# Altium PCB project2.PcbDoc
Units mil, origin at the board's own origin, x right, y up, seen from the top; angles counter-clockwise.
Board outline 4345 x 3770 mil, 2 copper layers (Top Layer, Bottom Layer); 46 components, 57 nets, 187 pads, 12 vias.
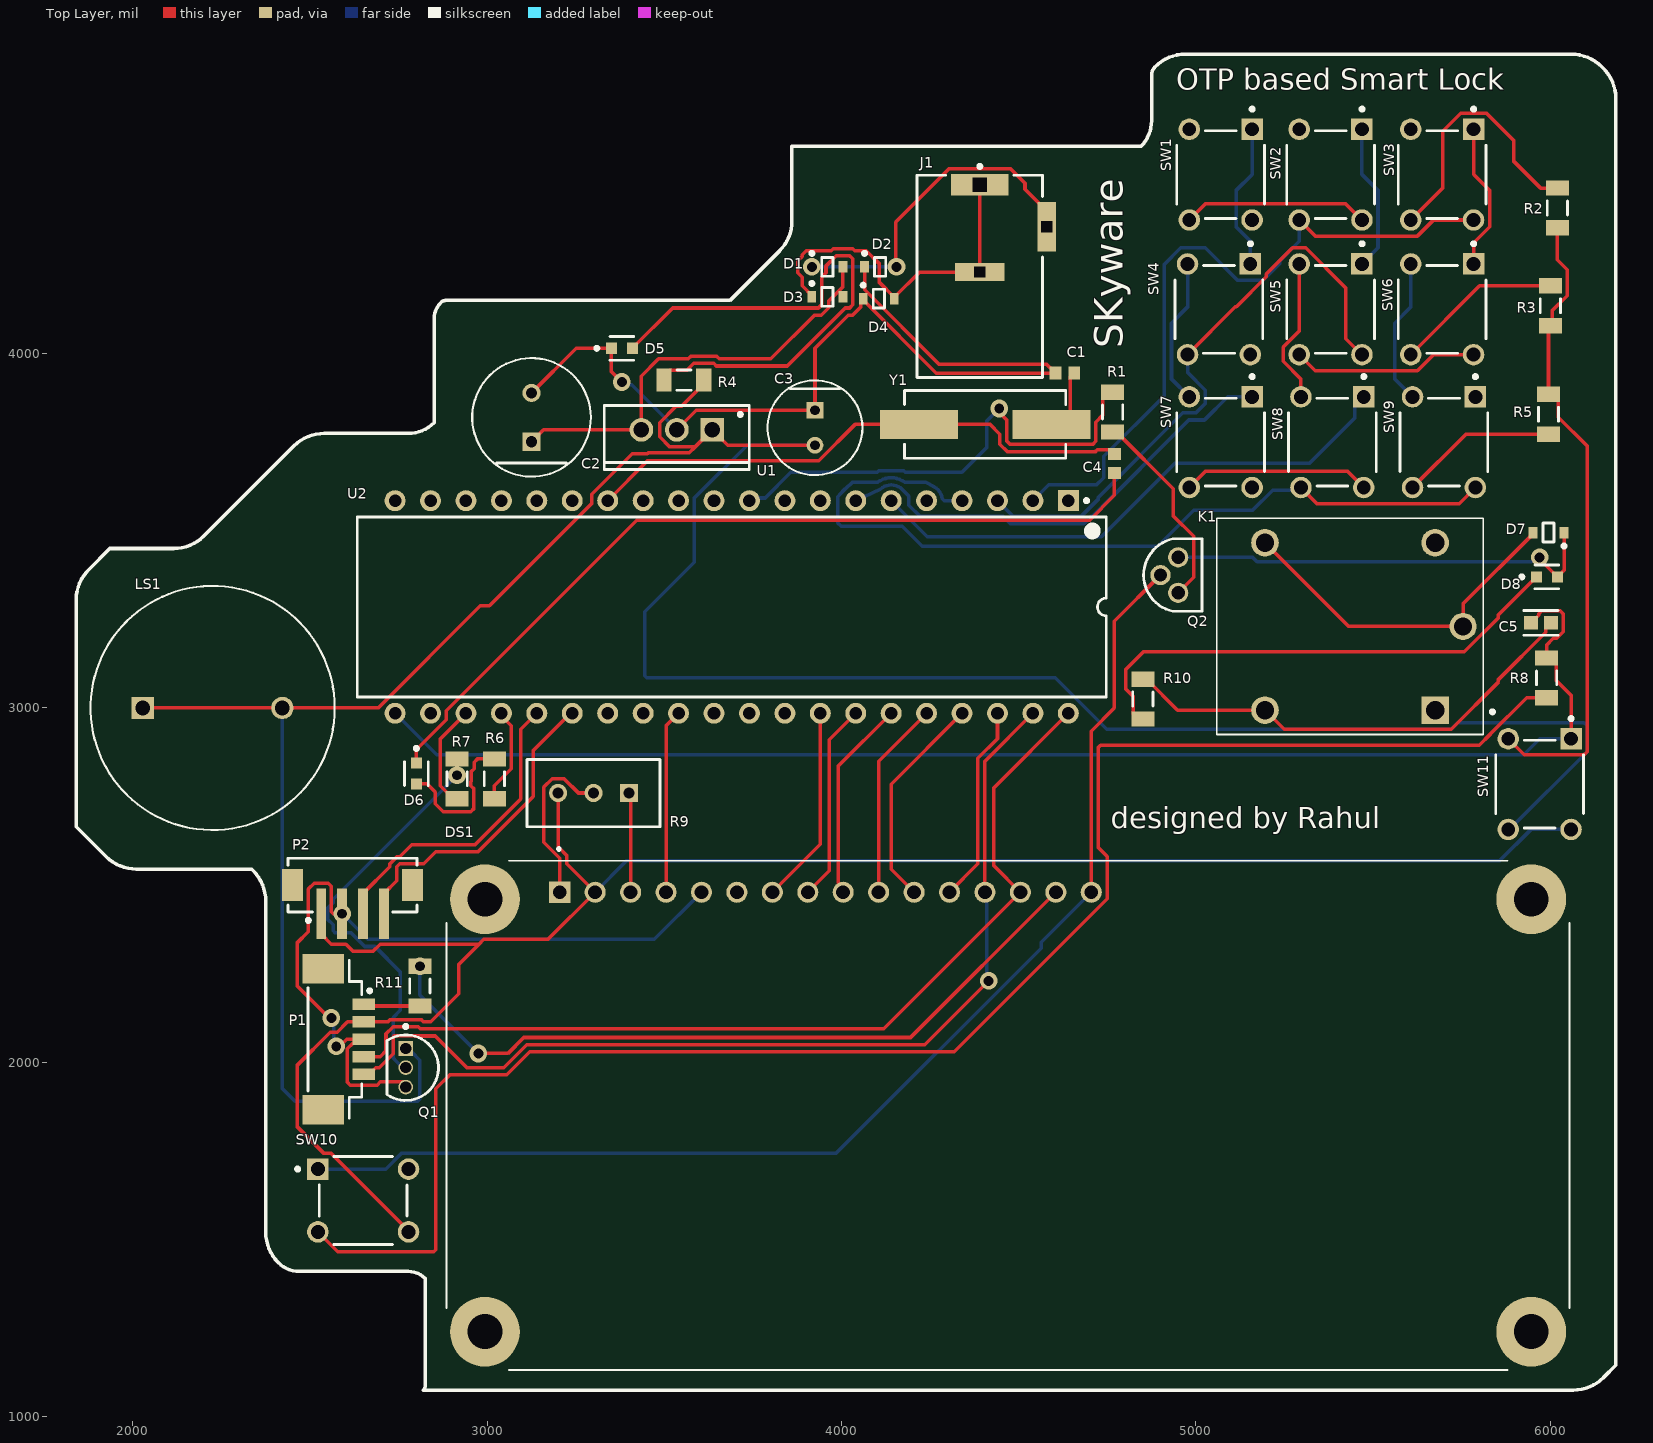
[diagram p0: Top Layer view]
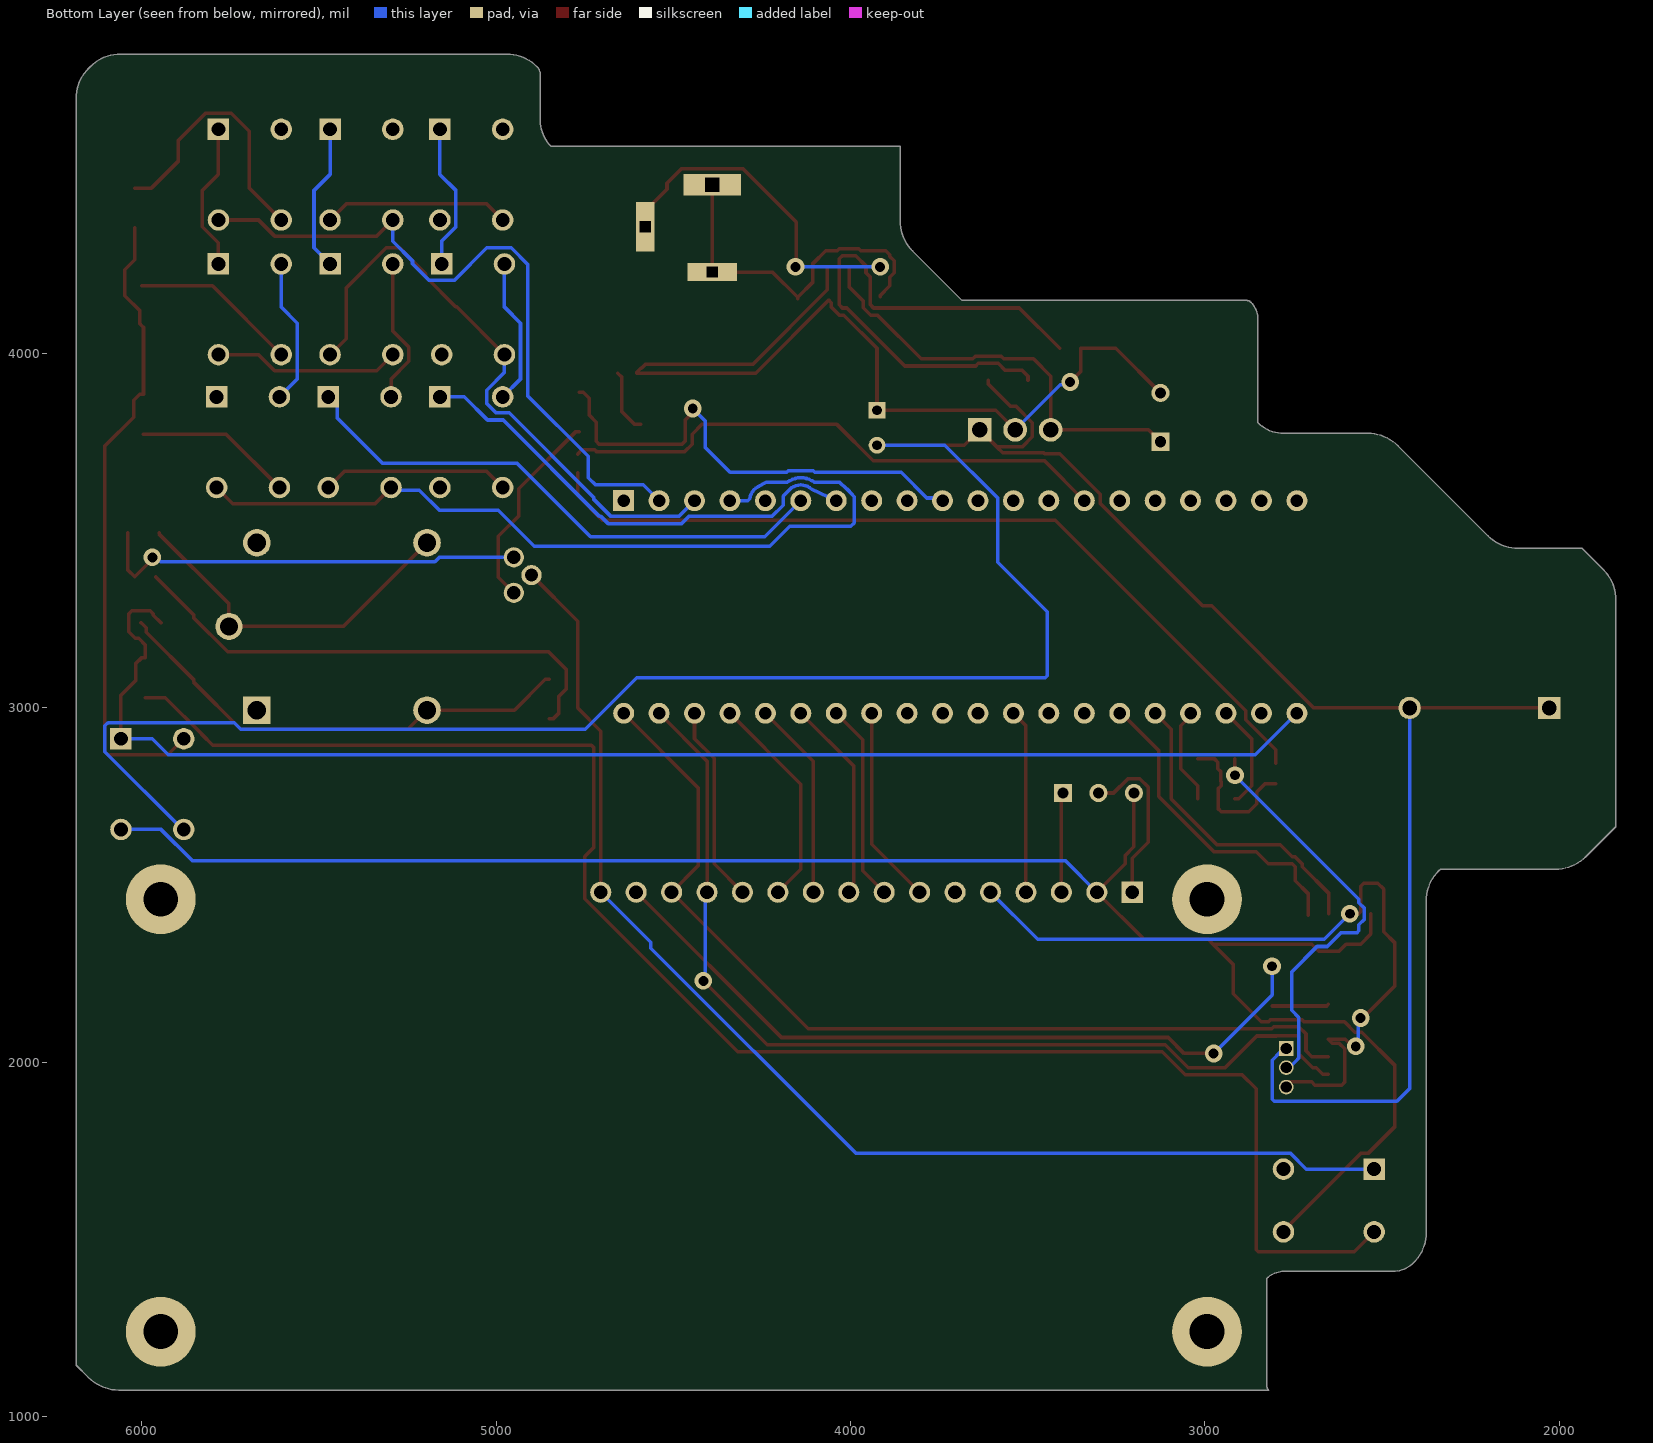
[diagram p1: Bottom Layer view, seen from below]
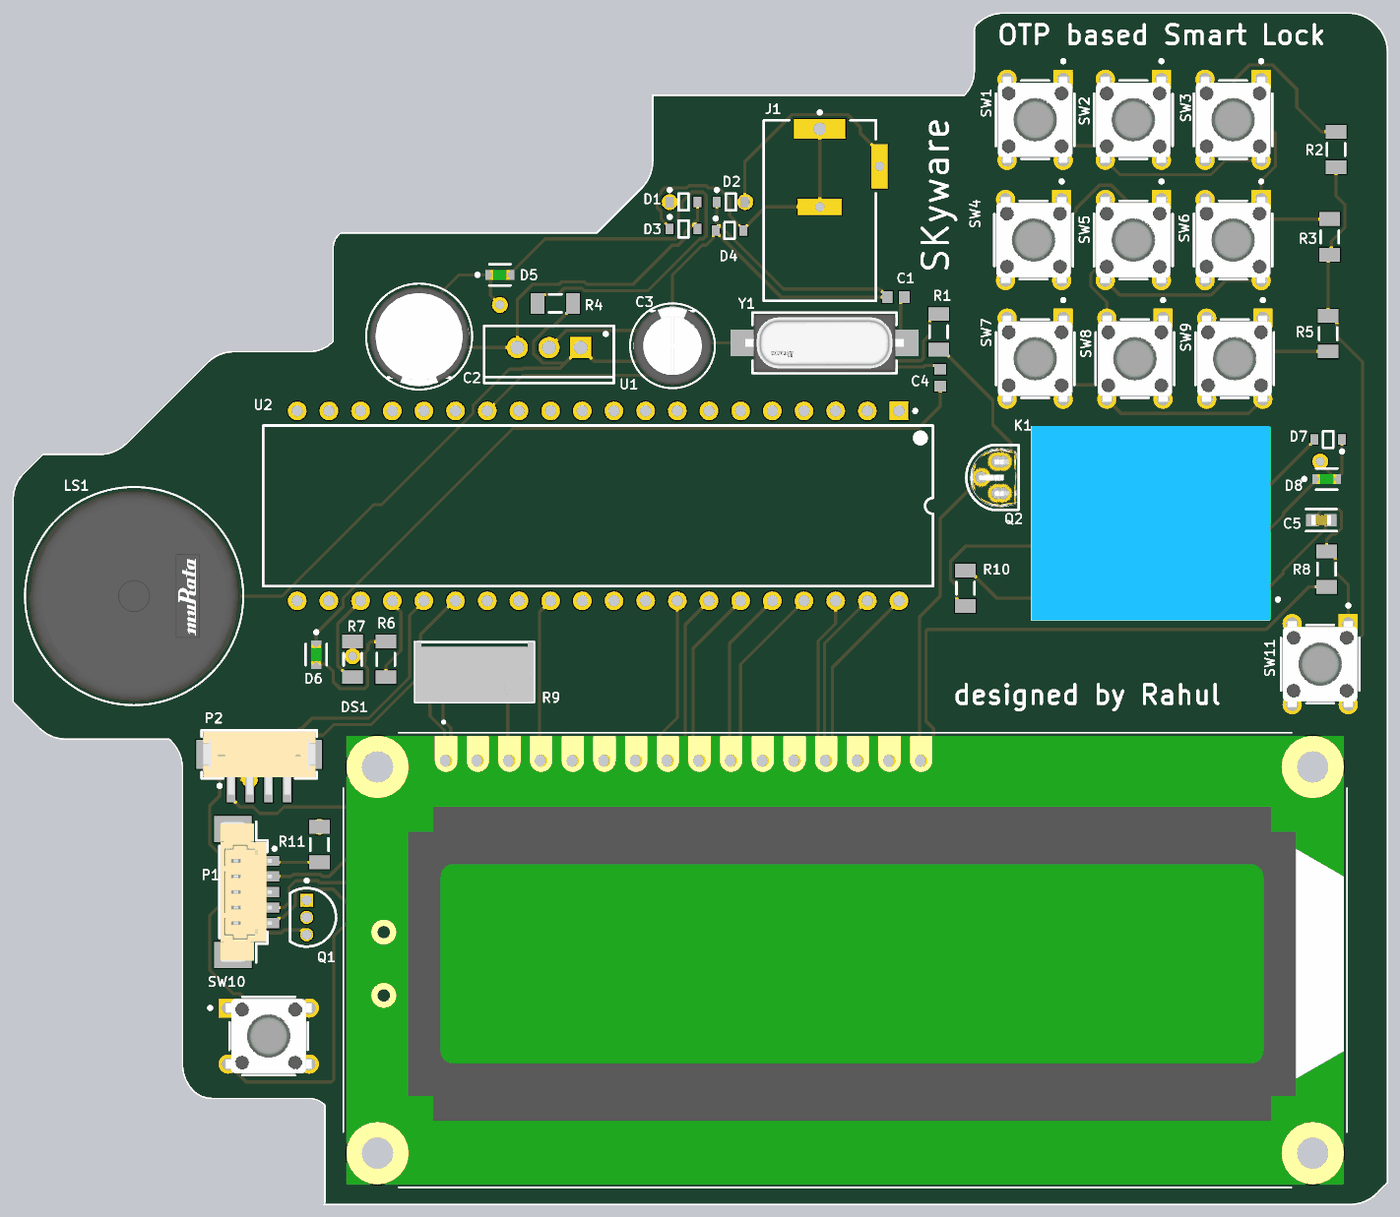
[diagram p2: 3D render of the assembled board from above, using the file's embedded part models]

## Layer stack, top to bottom
Top Solder: solder mask 0.4, Solder Resist, Dk 3.5
Top Layer: signal copper 1.4
Dielectric 1: dielectric 12.6, FR-4, Dk 4.8
Bottom Layer: signal copper 1.4
Bottom Solder: solder mask 0.4, Solder Resist, Dk 3.5

## Board outline
2375,2455 ccw(c2254.29,2455) 2339.64,2540.36 2335,2545 2010,2545 cw(c2010,2665.71) 1924.64,2580.36 1840,2665 1840,3305 cw(c1960.71,3305) 1875.36,3390.36 1935,3450 2115,3450 ccw(c2115,3570.71) 2200.36,3485.36 2454.64,3739.64 cw(c2540,3654.29) 2540,3775 2777.57,3775 ccw(c2777.57,3877.43) 2850,3805 2850,4096.72 cw(c2918.28,4096.72) 2870,4145 cw(c2882.07,4132.93) 2882.07,4150 3685,4150 3824.64,4289.64 ccw(c3739.29,4375) 3860,4375 3860,4585 4845,4585 ccw(c4772.57,4657.43) 4875,4657.43 4875,4786.36 cw(c4907.93,4786.36) 4884.64,4809.64 cw(c4970,4724.29) 4970,4845 6060,4845 cw(c6060,4724.29) 6145.36,4809.64 6149.64,4805.36 cw(c6064.29,4720) 6185,4720 6185,1145 6150.36,1110.36 cw(c6065,1195.71) 6065,1075 2820,1075 ccw(c2807.93,1087.07) 2825,1087.07 2825,1390 ccw(c2776.72,1341.72) 2776.72,1410 2469.85,1410 cw(c2469.85,1494.14) 2410.36,1434.64 cw(c2495.71,1520) 2375,1520

## Design rules (kind name [scope] priority, off if disabled: settings)
Clearance [All] p1: gap=10 ignorepadtopadclearanceinfootprint=FALSE
PolygonConnect [All] p1: connectstyle=Relief reliefconductorwidth=10 reliefentries=4 polygonreliefangle="90 Angle" airgapwidth=10
RoutingVias [All] p1: holewidth=28 width=50 viastyle="Through Hole" minholewidth=28 minwidth=50 maxholewidth=28 maxwidth=50
SolderMaskExpansion [All] p1: expansion=4 istentingtop=FALSE
Width [All] p1: maxlimit=10 minlimit=10 preferedwidth=10
30 further rules are at their usual default settings.

## Components (designator, comment, footprint, x,y, rotation, side; value= is the part's Value field where it differs from the comment)
C1 "GRM188R71H102KA01D" CAPC1608X90X35NL10T15 4630,3945 r0 top
C2 "EEUFM1V221L" FP-RAD-TH-D_8_0_5-L_15_1-MFG 3125,3820 r90 top
C3 "EEUHD1E101" FP-RAD-TH-D_6_3_0_5-L_11-MFG 3925,3790.79 r270 top
C4 "GRM188R71H102KA01D" CAPC1608X90X35NL10T15 4770,3690 r90 top
C5 "06035A221JAT2A" FP-0603-L_1_6_0_15-W_0_81-IPC_B 5973.58,3240 r0 top
D1 "BAT54HT1G" ONSC-SOD-323-2-477-02_V 3960,4245 r0 top
D2 "BAT54HT1G" ONSC-SOD-323-2-477-02_V 4108.9,4245 r0 top
D3 "BAT54HT1G" ONSC-SOD-323-2-477-02_V 3960,4160 r0 top
D4 "BAT54HT1G" ONSC-SOD-323-2-477-02_V 4105,4155 r0 top
D5 "LTST-C190GKT" FP-LTST-C190GKT-MFG 3380,4015 r0 top
D6 "LTST-C190GKT" FP-LTST-C190GKT-MFG 2800,2815 r270 top
D7 "BAT54HT1G" ONSC-SOD-323-2-477-02_V 5995,3495 r180 top
D8 "LTST-C190GKT" FP-LTST-C190GKT-MFG 5990.47,3370 r0 top
DS1 "RC1602B-BIW-CSV" LCD_RC1602B-BIW-CSV 4470,1850 r0 top
J1 "RAPC712X" SWITCH-RAPC712X-3_V 4390,4353.03 r0 top
K1 "SRD-05VDC-SL-C" RELAY_SRD-05VDC-SL-C 5435,3230 r180 top
LS1 "PKM17EPPH4001-B0" FP-PKM17EPPH4001-B0-MFG 2225,3000 r0 top
P1 "653105124022" 653105124022 2570,2065 r270 top
P2 "679304124022" 679304124022 2620,2500 r180 top
Q1 "BC547B" ONSC-TO-92-3-29-11 2770,1985 r270 top
Q2 "BC548" FP-135AN-MFG 4935.04,3375 r0 top
R1 "ERJ-8GEY0R00V" RESC3216X70X50NL05T20 4765,3835 r90 top
R2 "ERJ-8GEY0R00V" RESC3216X70X50NL05T20 6020,4411.1 r90 top
R3 "ERJ-8GEY0R00V" RESC3216X70X50NL05T20 6000,4135 r90 top
R4 "ERJ-8GEY0R00V" RESC3216X70X50NL05T20 3555,3925 r0 top
R5 "ERJ-8GEY0R00V" RESC3216X70X50NL05T20 5995,3828.9 r270 top
R6 "ERJ-8GEY0R00V" RESC3216X70X50NL05T20 3020,2800 r90 top
R7 "ERJ-8GEY0R00V" RESC3216X70X50NL05T20 2915,2800 r90 top
R8 "ERJ-8GEY0R00V" RESC3216X70X50NL05T20 5990,3085 r90 top
R9 "3296W-1-102LF" BOUR-3296W-1-3 3300,2760 r180 top
R10 "ERJ-8GEY0R00V" RESC3216X70X50NL05T20 4850,3025 r270 top
R11 "ERJ-8GEY0R00V" RESC3216X70X50NL05T20 2810,2215 r90 top
SW1 "1-1825910-4" FP-1-1825910-4-MFG 5070,4505 r0 top
SW2 "1-1825910-4" FP-1-1825910-4-MFG 5380,4505 r0 top
SW3 "1-1825910-4" FP-1-1825910-4-MFG 5695,4505 r0 top
SW4 "1-1825910-4" FP-1-1825910-4-MFG 5065,4125 r0 top
SW5 "1-1825910-4" FP-1-1825910-4-MFG 5380,4125 r0 top
SW6 "1-1825910-4" FP-1-1825910-4-MFG 5695,4125 r0 top
SW7 "1-1825910-4" FP-1-1825910-4-MFG 5070,3750 r0 top
SW8 "1-1825910-4" FP-1-1825910-4-MFG 5385,3750 r0 top
SW9 "1-1825910-4" FP-1-1825910-4-MFG 5700,3750 r0 top
SW10 "1-1825910-4" FP-1-1825910-4-MFG 2650,1610 r90 top
SW11 "1-1825910-4" FP-1-1825910-4-MFG 5970,2785 r0 top
U1 "L7805CV" TO220 3535,3785 r180 top
U2 "PIC16F887-I/P" PDIP600-P40 3690,3285 r270 top
Y1 "ABLS-8.000MHZ-B2-T" FP-ABLS-MFG 4405,3800 r180 top

## Footprints (in the part's own frame and the unit in brackets; to place one, negate y for a bottom-side part, rotate by r counter-clockwise, add the part's x,y. Pads: shape width x height; smd on the part's side, far side on the other; paste and mask are expansions set on the pad)
653105124022 [mm] "1.25mm SMT Male Vertical Shrouded Header, 5p"
  rect 0.81x1.6 smd mask+0.076: 1(-2.5,2.07) 2(-1.25,2.07)
  rect 0.81x1.6 smd: 3(0,2.07) 4(1.25,2.07) 5(2.5,2.07)
  rect 2.1x3 smd: MP1(-5.05,-0.83) MP2(5.05,-0.83)
  silkscreen extent -5.65,-1.92 5.65,2.62, body extent -5.6,-1.85 5.6,2.36, height 4.74
679304124022 [mm] "1.50mm SMT Male Vertical Shrouded Header, 4p"
  rect 0.7x3.6 smd: 1(2.25,2.05) 2(0.75,2.05) 3(-0.75,2.05) 4(-2.25,2.05)
  rect 1.5x2.3 smd: MP1(-4.3,0) MP2(4.3,0)
  silkscreen extent -4.62,-1.92 4.63,2.65, body extent -4.5,-1.85 4.5,3.35, height 5.49
BOUR-3296W-1-3 [mm] "THD, 3-Leads, Body 9.53x4.83mm, Pitch 2.54mm"
  rect 1.3x1.3 hole 0.8: 1(-2.54,0)
  round 1.3 hole 0.8: 2(0,0) 3(2.54,0)
  silkscreen extent -4.76,-2.41 4.76,2.42, body extent -4.76,-2.41 4.76,2.42, height 11.55
CAPC1608X90X35NL10T15 [mm] "Chip Capacitor, 2-Leads, Body 1.60x0.80mm, IPC Medium Density"
  rect 0.85x0.95 smd: 1(-0.675,0) 2(0.675,0)
  body extent -0.85,-0.45 0.85,0.45, height 0.9
FP-1-1825910-4-MFG [mm]
  rect 1.54x1.54 hole 0.99 paste-2539.97 mask+0: 1(2.25,3.25)
  round 1.54 hole 0.99 paste-2539.97 mask+0: 2(2.25,-3.25) 3(-2.25,3.25) 4(-2.25,-3.25)
  silkscreen extent -3.15,-3.15 3.15,4.82, body extent -3.24,-4.12 3.24,4.12, height 0.25
FP-135AN-MFG [mm]
  round 1.45 hole 0.95 paste-2539.97 mask+0: 1(0.38,-1.27) 2(-0.89,0) 3(0.38,1.27)
  silkscreen extent -2.1,-2.6 2.09,2.6, body extent -2.19,-2.7 2.19,2.7, height 0.25
FP-0603-L_1_6_0_15-W_0_81-IPC_B [mil]
  rect 39.63x38.12 smd paste+0 mask+0: 1(-28.58,0) 2(28.58,0)
  silkscreen extent -48,-35 48,35, body extent -58,-29 58,29, height 10
FP-ABLS-MFG [mm]
  rect 5.6x2.1 smd paste+0 mask+0: 1(-4.75,0) 2(4.75,0)
  silkscreen extent -5.77,-2.42 5.77,2.42, body extent -7.65,-2.52 7.65,2.52, height 0.25
FP-LTST-C190GKT-MFG [mm]
  rect 0.8x0.8 smd paste+0 mask+0: 1(-0.75,0) 2(0.75,0)
  silkscreen extent -1.92,-0.85 0.85,0.85, body extent -1.25,-0.55 1.25,0.55, height 0.25
FP-PKM17EPPH4001-B0-MFG [mm]
  rect 1.6x1.6 hole 1.05 paste-2539.97 mask+0: 1(-5,0)
  round 1.6 hole 1.05 paste-2539.97 mask+0: 2(5,0)
  silkscreen extent -8.75,-8.75 8.75,8.75, body extent -8.85,-8.85 8.85,8.85, height 0.25
FP-RAD-TH-D_6_3_0_5-L_11-MFG [mm]
  rect 1.2x1.2 hole 0.7 paste-2539.97 mask+0: 1(-1.25,0)
  round 1.2 hole 0.7 paste-2539.97 mask+0: 2(1.25,0)
  silkscreen extent -3.4,-3.4 3.4,3.4, body extent -3.5,-3.5 3.5,3.5, height 0.25
FP-RAD-TH-D_8_0_5-L_15_1-MFG [mm]
  rect 1.3x1.3 hole 0.8 paste-2539.97 mask+0: 1(-1.75,0)
  round 1.3 hole 0.8 paste-2539.97 mask+0: 2(1.75,0)
  silkscreen extent -4.25,-4.25 4.25,4.25, body extent -4.35,-4.35 4.35,4.35, height 0.25
LCD_RC1602B-BIW-CSV [mm]
  rect 1.508x1.508 / inner round 1.508 / far side rect 1.508x1.508 hole 1: 1(-32.14,16)
  round 1.508 hole 1: 2(-29.6,16) 3(-27.06,16) 4(-24.52,16) 5(-21.98,16) 6(-19.44,16) 7(-16.9,16) 8(-14.36,16) 9(-11.82,16) 10(-9.28,16) 11(-6.74,16) 12(-4.2,16) 13(-1.66,16) 14(0.88,16) 15(3.42,16) 16(5.96,16)
  round 5 hole 2.5: S1(-37.5,15.5) S2(37.5,15.5) S3(37.5,-15.5) S4(-37.5,-15.5)
  silkscreen extent -40.25,-18.25 40.25,19.2, body extent -40,-18 40,18, height 8.9
ONSC-SOD-323-2-477-02_V [mm] "SOD, 2-Leads, Body 1.7x1.25mm"
  rect 0.63x0.83 smd: 1(-1.115,0) 2(1.115,0)
  silkscreen extent -1.24,-0.67 0.4,1.09, body extent -0.85,-0.63 0.85,0.63, height 1.06
ONSC-TO-92-3-29-11 [mm] "TO, 3-Leads, Body Dia 4.7mm, Pitch 1.27mm"
  rect 1.05x1.05 hole 0.8: 1(-1.372,0)
  round 1.05 hole 0.8: 2(0,0) 3(1.397,0)
  silkscreen extent -3.07,-1.34 2.35,2.35, body extent -2.35,-1.33 2.36,2.36, height 7.87
PDIP600-P40 [mm] "DIP, 40-Pin, Row Spacing 15.24 mm, Pitch 2.54 mm"
  rect 1.5x1.5 hole 0.9: 1(-7.62,24.13)
  round 1.5 hole 0.9: 2(-7.62,21.59) 3(-7.62,19.05) 4(-7.62,16.51) 5(-7.62,13.97) 6(-7.62,11.43) 7(-7.62,8.89) 8(-7.62,6.35) 9(-7.62,3.81) 10(-7.62,1.27) 11(-7.62,-1.27) 12(-7.62,-3.81) 13(-7.62,-6.35) 14(-7.62,-8.89) 15(-7.62,-11.43) 16(-7.62,-13.97) 17(-7.62,-16.51) 18(-7.62,-19.05) 19(-7.62,-21.59) 20(-7.62,-24.13) 21(7.62,-24.13) 22(7.62,-21.59) 23(7.62,-19.05) 24(7.62,-16.51) 25(7.62,-13.97) 26(7.62,-11.43) 27(7.62,-8.89) 28(7.62,-6.35) 29(7.62,-3.81) 30(7.62,-1.27) 31(7.62,1.27) 32(7.62,3.81) 33(7.62,6.35) 34(7.62,8.89) 35(7.62,11.43) 36(7.62,13.97) 37(7.62,16.51) 38(7.62,19.05) 39(7.62,21.59) 40(7.62,24.13)
  silkscreen extent -7.74,-26.85 6.45,26.85, body extent -7.3,-26.85 7.3,26.85, height 6.35
RELAY_SRD-05VDC-SL-C [mm]
  rect 1.98x1.98 / inner round 1.98 / far side rect 1.98x1.98 hole 1.32: A1(-6.1,6)
  round 1.98 hole 1.32: A2(-6.1,-6) NC(6.1,6) NO(6.1,-6)
  round 1.935 hole 1.29: COM(-8.1,0)
  silkscreen extent -10.3,-7.75 9.55,7.75, body extent -9.6,-7.8 9.6,7.8, height 15.8
RESC3216X70X50NL05T20 [mm] "Chip Resistor, 2-Leads, Body 3.20x1.60mm, IPC Medium Density"
  rect 1.1x1.65 smd: 1(-1.425,0) 2(1.425,0)
  silkscreen extent -0.5,-0.72 0.5,0.72, body extent -1.63,-0.82 1.62,0.82, height 0.7
SWITCH-RAPC712X-3_V [mm] "CONN, 3-Leads, Body 14.5x9mm"
  rect 4.1x1.55 hole 1.01 square: 1(0,3.125)
  rect 3.55x1.3 hole 0.76 square: 2(0,-3.125)
  rect 1.3x3.55 hole 0.76 square: 3(4.8,0.125)
  silkscreen extent -4.5,-10.68 4.5,4.57, body extent -4.5,-10.68 4.5,3.83, height 11
TO220 [mm] "TO, Thru-Hole, Vertical, Heatsink Mounted; 3 In-Line Leads; Pitch 2.54 mm"
  rect 1.7x1.7 hole 1.1: 1(-2.54,0)
  round 1.7 hole 1.1: 2(0,0) 3(2.54,0)
  silkscreen extent -5.2,-1.75 5.2,2.85, body extent -5.25,-1.8 5.25,2.9, height 19.7

## Part data
C1 C4: library part CMP-2006-02891-1, Manufacturer=Murata, Part Number=GRM188R71H102KA01D
C2: library part CMP-05427-000678-1, "Aluminum Electrolytic Capacitors (Radial Lead Type) 220uF ±20% 35V", Capacitance=220uF, Case/Package=Radial, Dielectric Material=Aluminium, ESR (Equivalent Series Resistance)=41mR, Max Operating Temperature=105°C, Min Operating Temperature=-40°C, Package Quantity=200, Ripple Current=1.24A, Tolerance=20%, Voltage=35V, Construction=RADIAL, Diameter=8mm, Dissipation Factor=0.12%, Height=15mm, Height - Seated (Max)=0.65inch, Impedance=41mR, Lead Diameter=0.6mm, Lead Free="Lead Free", Lead Length=17mm, Lead Pitch=3.5mm, Length=15mm, Life (Hours)=3000Hour, Mount="Through Hole", Number of Pins=2, Packaging=Bulk, Radiation Hardening=No, REACH SVHC=Yes, RoHS Compliant=Yes, Series=FM, Termination=Radial, Voltage Rating=35V, Voltage Rating (DC)=35V
C3: library part CMP-05427-000916-1, "Aluminum Electrolytic Capacitors (Radial Lead Type) AEC-Q200 Qualified 100uF ±20% 25V", Capacitance=100uF, Case/Package=Radial, Max Operating Temperature=105°C, Min Operating Temperature=-55°C, Package Quantity=200, Ripple Current=130mA, Tolerance=20%, Voltage=25V, Construction=RADIAL, Diameter=6.3mm, Height=11.2mm, Height - Seated (Max)=0.5inch, Lead Diameter=0.5mm, Lead Pitch=2.5mm, Lead/Base Style=Straight, Length=11.2mm, Life (Hours)=1000Hour, Mount="Through Hole", Number of Pins=2, Packaging=Bulk, Polarity=Polar, Radiation Hardening=No, REACH SVHC="No SVHC", Ripple Current (AC)=130mA, RoHS Compliant=Yes, Series="Automotive, AEC-Q200, HD", Termination=Radial, Voltage Rating=25V, Voltage Rating (DC)=25V
C5: library part CMP-2006-04275-2, "General Purpose Ceramic Capacitor, 0603, 220pF, 5%, NP0, 30ppm/°C, 50V", Capacitance=220pF, Case Code (Imperial)=0603, Case Code (Metric)=1608, Dielectric=C0G, Dielectric Material=Ceramic, Insulation Resistance=100GR, Max Operating Temperature=125°C, Min Operating Temperature=-55°C, Package Quantity=1, Temperature Coefficient=30ppm/°C, Tolerance=5%, Voltage=50V, Case/Package=0603, Contact Plating=Tin, Depth=0.81mm, Height=0.63mm, Lead Free="Lead Free", Length=1.6mm, Mount="Surface Mount", Number of Pins=2, Packaging="Tape and Reel", Radiation Hardening=No, REACH SVHC="No SVHC", RoHS Compliant=Yes, Termination=SMD/SMT, Thickness=0.035inch, Voltage Rating=50V, Voltage Rating (DC)=50V, Width=0.81mm
D1 D2 D3 D4 D7: library part CMP-1055-00462-1, "Schottky Barrier Diode, 2-Pin SOD-323, Pb-Free, Tape and Reel", Manufacturer="On Semiconductor", ComponentLink1Description="Manufacturer URL", ComponentLink1URL=http://www.onsemi.com/, ComponentLink2Description=Datasheet, ComponentLink2URL=http://www.onsemi.cn/pub_link/Collateral/BAT54HT1-D.PDF, ComponentLink3Description="Package Specification", ComponentLink3URL=http://www.onsemi.com/pub_link/Collateral/477-02.PDF.1, Configuration=Single, DatasheetVersion="Rev. 6", IFSM Max (A)=0.6, Mounting Technology="Surface Mount", PackageDescription="2-Pin SOD, Body 1.7 x 1.25 mm", PackageReference=SOD-323-2-477-02, PackageVersion="Rev. H, 03/2007", Packing="Tape and Reel", PartNumber=BAT54HT1G, RoHS=TRUE, trr Max (ns)=5
D5 D6 D8: library part CMP-22017-000005-2, "LED GREEN CLEAR CHIP SMD", Case Code (Imperial)=0603, Case Code (Metric)=1608, Color=Green, Forward Current=30mA, Forward Voltage=2.1V, Lens Color=Colorless, Max Operating Temperature=85°C, Min Operating Temperature=-55°C, Package Quantity=1, Power Dissipation=100mW, Reverse Voltage=5V, Test Current=10mA, Voltage=2V, Case/Package=0603, Depth=0.8mm, Dominant Wavelength=569nm, Height=0.8mm, Illumination Color=Green, Lead Free="Lead Free", Length=1.6mm, Lens Style=Clear, Lens Transparency=Clear, Luminous Intensity=6mcd, Mount="Surface Mount", Number of Elements=1, Number of LEDs=1, Number of Pins=2, Packaging="Tape and Reel", Power Rating=100mW, Radiation Hardening=No, Viewing Angle=130°, Wavelength=565nm, Width=0.8mm
DS1: "Display: LCD; alphanumeric; STN Negative; 16x2; blue; LED; PIN: 16", Package=None, Availability="Not in stock", Check_prices=https://www.snapeda.com/parts/RC1602B-BIW-CSV/Raystar/view-part/?ref=eda, MF=Raystar, MP=RC1602B-BIW-CSV, Price=None, SnapEDA_Link=https://www.snapeda.com/parts/RC1602B-BIW-CSV/Raystar/view-part/?ref=snap
J1: library part CMP-2000-05383-1, "Conn Powerjack Mini R/A PCMT, 5 A, 3-Pin THD, RoHS", Color=Black, Current Rating=5A, Manufacturer=Switchcraft, Standard Package=2,500, Catalog Drawings="RAPC7(1,2)2XSide /  / RAPC7(1,2)2XTop", Category=Connectors,Interconnects, Connector Type=Jack, Contact Material=Brass, Contact Material - Plating=Nickel, Datasheet URL=https://datasheet.ciiva.com/391/rapc712x-cd-391666.pdf, Datasheet Version="Rev. A, 08/2005", Dynamic Catalog=SwitchcraftInc, Family=Barrel-PowerConnectors, Gender=Male, Housing Color=Black, Housing Material=Thermoplastic, Internal Switch(s)=SingleSwitch,NormallyClosed, Manufacturer URL=http://www.switchcraft.com/, Mating Products="SC1539-ND / -CONNPLUGMINIPWR2CONDBLK/RED / SC1051-ND / -CONNPLUGMINIPOWER2CONDBLACK", Mounting Type=ThroughHole,RightAngle, Number of Positions/Contacts=2Conductors,2Contacts, Other Names="Q2387461 / Q2526383 / RAPC712X-ND / SC237", Plug/Mating Plug Diameter=2.5mmID,5.5mmOD, RoHS Information=SwitchcraftRoHSInfo, Shielding=Unshielded, Termination=SolderEyelet(s)
K1: "5V Trigger Relay Module For Arduino And Raspberry Pi 5V Trigger Relay Module For Arduino And Raspberry Pi", Package="NON STANDARD-5 Songle Relay", Availability="Not in stock", Check_prices=https://www.snapeda.com/parts/SRD-05VDC-SL-C/Songle+Relay/view-part/?ref=eda, MF="Songle Relay", MP=SRD-05VDC-SL-C, Price=None, SnapEDA_Link=https://www.snapeda.com/parts/SRD-05VDC-SL-C/Songle+Relay/view-part/?ref=snap
LS1: library part CMP-06202-000027-1, "AUDIO PIEZO TRANSDUCER 25V TH", Capacitance=7nF, Frequency=4kHz, Max Operating Temperature=70°C, Max Supply Voltage=25V, Min Operating Temperature=-20°C, Nominal Input Voltage=3V, Package Quantity=600, Diameter=17mm, Height=7mm, Lead Free="Lead Free", Max Frequency=4kHz, Mount="Through Hole", Packaging=Bulk, Radiation Hardening=No, REACH SVHC="No SVHC", Self Resonant Frequency=4kHz, Termination=Solder, Voltage Rating=3V, Voltage Rating (DC)=25V, Washable=No
P1: library part CMP-1502-00760-2, Color="Beige, White", Contact Resistance=20mΩ, Current Rating=1A, Flammability Rating="UL94 V-0", Insulation Resistance=100MΩ, Max Operating Temperature=85°C, Min Operating Temperature=-40°C, Operating Supply Voltage=125V, Connector Type="Male Pin", Contact Gender=Male, Contact Material=Copper, Contact Mating Length=2.159mm, Contact Plating=Tin, Gender=Male, Height=4.75mm, Housing Material=Nylon, Insulation=Insulated, Lead Pitch=1.25mm, Length=11mm, Mount="Surface Mount", NexarPartId=18818279, Number of Contacts=5, Number of Pins=5, Number of Positions=5, Number of Rows=1, Orientation=Vertical, Packaging="Tape and Reel", Pitch=1.25mm, REACH SVHC=Unknown, RoHS=Compliant, Termination=SMD/SMT, Voltage Rating=125V, Width=11mm
P2: library part CMP-1502-00723-2, Color="Beige, White", Contact Resistance=20mΩ, Current Rating=1A, Flammability Rating="UL94 V-0", Insulation Resistance=100MΩ, Max Operating Temperature=85°C, Min Operating Temperature=-25°C, Operating Supply Voltage=50V, Connector Type="Male Pin", Contact Gender=Male, Contact Material=Copper, Contact Plating=Tin, Gender=Male, Height=5mm, Housing Material=Nylon, Insulation=Insulated, Lead Pitch=1.5mm, Length=9mm, Mount="Surface Mount", NexarPartId=18818283, Number of Contacts=4, Number of Pins=4, Number of Positions=4, Number of Rows=1, Orientation=Vertical, Packaging="Tape and Reel", Pitch=1.5mm, REACH SVHC="No SVHC", RoHS=Compliant, Termination=SMD/SMT, Voltage Rating=50V, Width=9mm
Q1: library part CMP-1048-01467-1, "Amplifier Transistor, NPN Silicon, 3-Pin TO-92, Bulk Box", Manufacturer="On Semiconductor", ComponentLink1Description="Manufacturer URL", ComponentLink1URL=http://www.onsemi.com/, ComponentLink2Description=Datasheet, ComponentLink2URL=http://www.onsemi.com/pub_link/Collateral/BC546-D.PDF, ComponentLink3Description="Package Specification", ComponentLink3URL=http://www.onsemi.cn/pub_link/Collateral/2N6426-D.PDF, DatasheetVersion="Rev. 7", fT Min (MHz)=150, IC Continuous (A)=0.1, Mounting Technology="Through Hole", PackageDescription="3-Pin Transistor Outline, Body 4.825 x 3.685 mm, Pitch 1.27 mm", PackageReference=TO-92-3-29-11_AM_SL, PackageVersion="Rev. AM", Packing="Bulk Box", PartNumber=BC547B, Polarity=NPN, RoHS=FALSE
Q2: library part CMP-00278-84324557-1, "BC548 Bulk Through Hole NPN Single Bipolar (BJT) Transistor 110 @ 2mA 5V 100mA 500mW 300MHz", Case/Package=TO-92, Collector Base Voltage (VCBO)=30V, Collector Emitter Saturation Voltage=250mV, Current Rating=100mA, Emitter Base Voltage (VEBO)=5V, Frequency=300MHz, Max Operating Temperature=150°C, Max Power Dissipation=500mW, Min Operating Temperature=-65°C, Collector Emitter Breakdown Voltage=30V, Collector Emitter Voltage (VCEO)=30V, Element Configuration=Single, Gain Bandwidth Product=300MHz, hFE Min=110, Lead Free="Lead Free", Max Collector Current=100mA, Max Frequency=300MHz, Mount="Through Hole", NexarPartId=84324557, Number of Elements=1, Number of Pins=3, Packaging=Bulk, Polarity=NPN, Power Dissipation=500mW, Radiation Hardening=No, REACH SVHC="No SVHC", RoHS=Compliant, Termination="Through Hole", Transition Frequency=300MHz, Voltage Rating (DC)=30V, Weight=200mg
R1 R2 R3 R4 R5 R6 R7 R8 R10 R11: library part CMP-2003-00541-1, Manufacturer=Panasonic, Part Number=ERJ-8GEY0R00V
R9: library part CMP-1747-00002-1, "Square Trimpot(R) Trimming Potentiometer, 1000 Ohm, -55 to 125 degC, 3-Pin THD, RoHS, Tube", Case Code (Imperial)=0603, Case Code (Metric)=1608, Max Operating Temperature="155 degC", Min Operating Temperature="-55 degC", Package Quantity=5000, Power Rating="100 mW", Resistance="4.7 kohm", Tolerance=1%, Voltage Rating="75 V", Case\Package=0603, ComponentLink1Description="Manufacturer URL", ComponentLink1URL=http://www.bourns.com/, ComponentLink2Description=Datasheet, ComponentLink2URL=http://www.bourns.com/docs/Product-Datasheets/3296.pdf, DatasheetVersion=May-16, Height="0.45 mm", Length="1.6 mm", Mount="Surface Mount", PackageDescription="3-Pin Through Hole Device, Body 9.53 x 4.83 mm, Pitch 2.54 mm", PackageReference=3296W-1-3, Packaging="Tape and Reel", Pins=2, Radiation Hardening=No, REACH SVHC=Yes, RoHSCompliant=true, Weight="7.1E-05 oz", Width="0.8 mm"
SW1 SW2 SW3 SW4 SW5 SW6 SW7 SW8 SW9 SW10 SW11: library part CMP-03407-000002-1, "SWITCH TACTILE SPST-NO 0.05A 24V", Contact Current Rating=50mA, Contact Resistance=100mΩ, Manufacturer="TE Connectivity", Operating Force=160gf, Temperature="-35°C to +85°C", Temperature Range High=+85°C, Temperature Range Low=-35°C, Voltage Rating Dc=24V, Automotive=No, Category=Switch, ComponentLink2Description=Datasheet, ComponentLink2URL=https://www.te.com/commerce/DocumentDelivery/DDEController?Action=showdoc&DocId=Customer+Drawing%7F1825910%7FC10%7Fpdf%7FEnglish%7FENG_CD_1825910_C10.pdf%7F1-1825910-4, Device Class L1=Electromechanical, Device Class L2=Switches, Device Class L3="Tactile Switches", Digikey Description="SWITCH TACTILE SPST-NO 0.05A 24V", Electromechanical Life=100000Cycles, Height=9.8mm, Lead Free=Yes, Manufacturer Part Number=1-1825910-4, Mount="Through Hole", Mouser Description="Tactile Switches 6MM ACTHIGH TEMP TACT SWITCH", Octopart=https://octopart.com/1-1825910-4-te+connectivity-42270468, Package=1-1825910-4, RoHS=TRUE, Throw Configuration=SPST-NO
U1: library part CMP-0244-00483-1, "Positive Voltage Regulator, 5V, 3-Pin TO-220", ComponentLink1Description="Manufacturer URL", ComponentLink1URL=http://www.st.com, ComponentLink2Description=Datasheet, ComponentLink2URL=http://www.st.com/internet/com/TECHNICAL_RESOURCES/TECHNICAL_LITERATURE/DATASHEET/CD00000444.pdf, ComponentLink3Description="Package Specification", ComponentLink3URL=http://www.st.com/internet/com/TECHNICAL_RESOURCES/TECHNICAL_LITERATURE/PACKAGE_INFORMATION/CD00004649.pdf, DatasheetVersion=16/11/2011, PackageDescription="TO, Thru-Hole, Vertical, Heatsink Mounted; 3 In-Line Leads; Pitch 2.54 mm", PackageReference=TO220, PackageVersion=ver3.0
U2: library part CMP-0115-00049-1, "Flash-Based, 8-Bit CMOS Microcontroller with nanoWatt Technology, 8K (x14-Bit words) Program Memory, 624 Bytes Data Memory, 35 I/O pins, 40-Pin PDIP, Standard VDD Range, Industrial Temperature", DatasheetVersion="revF, Apr-2009", PackageDescription="40-Lead Plastic Dual In-Line (P) - 600 mil Body [PDIP]", PackageReference=PDIP600-P40, PackageVersion="revBB, Aug-2009"
Y1: library part CMP-27762-009874-1, "CRYSTAL 8.0000MHZ 18PF SMD", Case/Package=SMD/SMT, ESR (Equivalent Series Resistance)=80R, Frequency=8MHz, Frequency Stability=50ppm, Frequency Tolerance=20ppm, Load Capacitance=18pF, Max Operating Temperature=70°C, Min Operating Temperature=-20°C, Operating Frequency="8 MHz", Package Quantity=1000, Accuracy=20ppm, Contact Plating=Tin, Depth=4.7mm, Height=0.165inch, Lead Free="Lead Free", Length=11.4mm, Mount="Surface Mount", Number of Pins=2, Packaging="Tape and Reel", Radiation Hardening=No, REACH SVHC="No SVHC", Series=ABLS, Series Resistance=80R, Termination=SMD/SMT, Tolerance=20ppm, Width=4.7mm

## Via types
v1: diameter 50, hole 28, Top Layer to Bottom Layer, 12 vias

## Nets (pads, with @x,y where several pads share a name; then routed paths per layer and width w, separated by ;. In a path a pad name is that pad's centre, name@x,y a point inside that pad or via, vN(x,y) a via of type N, cw(c..) or ccw(c..) an arc to the next point about the centre after c; other vN are vias at no path point)
NetC1_1: C1.1 C2.2 C3.1 D2.1 D4.1 D5.1 U1.2 | length 2712.8
  Top Layer w10: C2.2 3251.1,4015 D5.1 3350.47,3949.53 v1(3380,3920) ; U1.2 3590,3840 C3.1 3925,4014.96 4018.7,4108.66 4030.8,4108.66 4053.7,4131.57 4053.7,4143.66 4061.1,4151.06 4267.17,3945 C1.1 4603.43,3946.97 4591.69,3958.7 4589.72,3958.7 4578.43,3970 4275,3970 4065,4180 D2.1
  Bottom Layer w10: v1(3380,3920) 3387.65,3912.35 3407.65,3912.35 U1.2
NetC1_2: C1.2 Y1.1 | length 181.4
  Top Layer w10: Y1.1 4608.5,3800 4644.84,3836.34 4644.84,3933.27 C1.2
NetC2_1: C2.1 D1.2 D3.2 U1.3 | length 1222.6
  Top Layer w10: C2.1 3158.9,3785 U1.3 3435,3936.45 3483.55,3985 3567.47,3985 3574.95,3992.48 3647.25,3992.48 3654.73,3985 3800,3985 3923.66,4108.66 3943,4108.66 3963.5,4129.16 3963.5,4148.5 4003.9,4188.9 D1.2
NetC3_2: C3.2 LS1.1 LS1.2 Q1.1 R4.2 SW11.4 U1.1 | length 8314
  Top Layer w10: LS1.1 LS1.2 2692.03,3000 2980.38,3288.35 3006.32,3288.35 3295,3577.03 3295,3602.97 3409.22,3717.19 3452.19,3717.19 3455,3720 3570,3720 3586.54,3736.54 ; R4.2 3611.1,3914.17 3548.23,3851.3 3532.76,3851.3 3486.54,3805.07 3486.54,3764.93 3514.93,3736.54 3586.54,3736.54 ; C3.2 3678.43,3741.57 U1.1 3586.54,3736.54
  Bottom Layer w10: LS1.2 2421.85,1925.86 2457.71,1890 2804.14,1890 2810,1895.86 2810,2005.44 2786.11,2029.33 2785.67,2029.33 Q1.1@2770,2045 ; C3.2 3733.6,3741.57 3584.53,3592.5 3584.53,3411.44 3445,3271.91 3445,3090.86 3450.86,3085 4602.97,3085 4748.17,2939.8 5720.35,2939.8 5738.81,2958.27 6095.11,2958.27 6103.9,2949.48 6103.9,2876.42 5884.52,2657.05 SW11.4
NetC4_1: C4.1 D6.1 | length 2383.5
  Top Layer w10: D6.1 2800,2882.03 2884.53,2966.56 2884.53,2992.5 3422.03,3530 4700,3530 4770,3600 C4.1
NetC4_2: C4.2 U2.14 Y1.2 | length 1574
  Top Layer w10: U2.14 3452.19,3697.19 3935.24,3697.19 4038.05,3800 Y1.2 4419.22,3800 4446.77,3772.45 4446.77,3744.16 4467.27,3723.66 4716.74,3723.66 4721.39,3728.31 4758.27,3728.31 C4.2
NetC5_1: C5.1 R8.2 SW11.1 U2.21 | length 3910.2
  Top Layer w10: C5.1 5945.75,3240 5967.34,3261.59 5967.34,3265.27 5976.13,3274.06 6028.18,3274.06 6036.97,3265.27 6036.97,3214.73 6018.48,3196.24 6008.49,3196.24 5990,3177.76 R8.2 6000.83,3141.1 6017.48,3124.45 6017.48,3076.76 6058.58,3035.66 SW11.1
  Bottom Layer w10: U2.21 2857.36,2867.64 5925.3,2867.64 5970.61,2912.95 SW11.1
NetC5_2: C5.2 K1.NC R10.1 | length 1346.2
  Top Layer w10: R10.1 4860.83,3081.1 4948.15,2993.78 K1.NC 5248.82,2939.8 5720.35,2939.8 5853.84,3073.3 5853.84,3080.29 5987.34,3213.79 5987.34,3225.94 6001.4,3240 C5.2
NetD1_1: D1.1 D2.2 J1.3 | length 959.7
  Top Layer w10: v1(4155,4245) D2.2 4152.8,4371.29 4303.08,4521.57 4476.92,4521.57 4517.65,4480.84 4517.65,4463.57 4578.98,4402.24 J1.3
  Bottom Layer w10: v1(3916.1,4245) v1(4155,4245)
NetD3_1: D3.1 D4.2 J1.1 J1.2 | length 1016
  Top Layer w10: D3.1 3916.1,4163.94 3888.7,4191.34 3888.7,4215.83 3876.1,4228.43 3876.1,4261.57 3888.7,4274.17 3888.7,4278.7 3900,4290 3970.66,4290 3977,4296.34 4030.8,4296.34 4037.14,4290 4069.95,4290 4105.72,4254.23 4105.72,4202.11 D4.2@4148.9,4158.94 ; D4.2 D4.2@4148.9,4158.94 ; J1.1 J1.2 4219.96,4230 D4.2@4148.9,4158.94
NetD5_2: D5.2 R4.1 | length 1553.6
  Top Layer w10: D5.2 3523.19,4128.66 3934.72,4128.66 3943.5,4137.45 3943.5,4215.83 3956.1,4228.43 3956.1,4247.16 3985.28,4276.34 4022.51,4276.34 4031.3,4267.55 4031.3,4137.45 4022.51,4128.66 4010.42,4128.66 3846.76,3965 3646.45,3965 3638.97,3972.48 3583.24,3972.48 3563.24,3952.48 3515.55,3952.48 3498.9,3935.83 R4.1
NetD6_2: D6.2 R6.2 | length 416.7
  Top Layer w10: D6.2 2830.75,2785.47 2853.53,2762.69 2853.53,2730.02 2876.31,2707.24 2953.69,2707.24 2962.48,2716.03 2962.48,2771.76 2953.69,2780.55 2953.69,2792.12 2955,2793.43 2955,2820.76 2963.11,2828.86 2963.11,2846.69 2972.52,2856.1 R6.2
NetD7_1: D7.1 D8.2 Q2.3 | length 1239.1
  Top Layer w10: v1(5970,3425) 5970,3420 D8.2 6038.9,3388.9 D7.1
  Bottom Layer w10: Q2.3 5159.73,3425 5172.48,3412.24 5946.42,3412.24 5959.18,3425 v1(5970,3425)
NetD7_2: D7.2 K1.COM K1.NO | length 1003.6
  Top Layer w10: K1.NO 5431.06,3230 K1.COM 5753.9,3293.86 5951.1,3491.06 D7.2
NetD8_1: D8.1 R10.2 | length 1437.3
  Top Layer w10: R10.2 4839.17,2968.9 4822.52,2985.55 4822.52,3033.24 4802.52,3053.24 4802.52,3108.97 4852.04,3158.49 5757.47,3158.49 5853.83,3254.85 5853.83,3262.89 D8.1
NetDS1_1: DS1.1 R9.2 | length 482.9
  Top Layer w10: DS1.1 3204.65,2575.35 3159.41,2620.59 3159.41,2776.81 3183.19,2800.59 3216.81,2800.59 3257.4,2760 R9.2
NetDS1_2: DS1.2 P1.2 P2.1 R9.3 SW10.4 SW11.2 | length 5391.6
  Top Layer w10: P2.1 2531.42,2362.2 2560.2,2333.43 2601.25,2333.43 2621.25,2313.43 2677.8,2313.43 2697.8,2333.43 2976.86,2333.43 ; SW10.4 2777.95,1524.52 2558.58,1743.9 2538,1743.9 2463.27,1818.63 2463.27,1990.93 2557.34,2085 2576.57,2085 2605.78,2114.21 2720.09,2114.21 2726.55,2120.67 2813.45,2120.67 2819.91,2114.21 2840.66,2114.21 2919.47,2193.02 2919.47,2276.04 2976.86,2333.43 ; R9.3 3200,2608.28 3224.65,2583.64 3224.65,2559.92 DS1.2 3171.54,2346.81 2990.24,2346.81 2976.86,2333.43
  Bottom Layer w10: DS1.2 3393.09,2568.36 5856.82,2568.36 5945.5,2657.05 SW11.2
NetDS1_3: DS1.3 R9.1 | length 282
  Top Layer w10: R9.1 3404.65,2755.35 DS1.3
NetDS1_4: DS1.4 U2.29 | length 519.7
  Top Layer w10: DS1.4 3504.65,2949.65 U2.29
NetDS1_5: DS1.5 P1.3 P2.2 Q1.3 | length 2205.6
  Top Layer w10: v1(2560,2125) 2554.53,2125 2463.27,2216.27 2463.27,2336.63 2495.24,2368.6 2495.24,2488.97 2511.42,2505.16 2551.41,2505.16 2560.2,2496.37 2560.2,2425.15 2566.05,2419.29 v1(2590.47,2419.29) ; v1(2573.91,2045) 2583.77,2045 2603.77,2065 P1.3 2640.55,2054.06 2621.11,2054.06 2605,2037.95 2605,1944.42 2613.79,1935.63 2689.21,1935.63 2698.58,1945 Q1.3@2770,1945 ; DS1.5@3596.77,2472.04 DS1.5
  Bottom Layer w10: v1(2560,2125) 2566.95,2118.05 2566.95,2051.95 v1(2573.91,2045) ; v1(2590.47,2419.29) 2662.95,2346.81 3471.54,2346.81 DS1.5
NetDS1_7: DS1.7 U2.33 | length 561.1
  Top Layer w10: DS1.7 3940,2615.28 U2.33
NetDS1_8: DS1.8 U2.34 | length 561.1
  Top Layer w10: DS1.8 3965,2540.28 3965,2910 U2.34
NetDS1_9: DS1.9 U2.35 | length 573.3
  Top Layer w10: DS1.9 4004.65,2493.28 3990,2507.93 3990,2835 U2.35
NetDS1_10: DS1.10 U2.36 | length 561.1
  Top Layer w10: DS1.10 4104.65,2849.65 U2.36
NetDS1_11: DS1.11 U2.37 | length 614.7
  Top Layer w10: DS1.11 4140,2544.57 4140,2785 U2.37
NetDS1_12: DS1.12 U2.38 | length 561.1
  Top Layer w10: DS1.12 4384.65,2559.92 4384.65,2857.93 4440,2913.28 U2.38
NetDS1_13: DS1.13 P1.5 U2.39 | length 2790.4
  Top Layer w10: P1.5 2667.05,1966.57 2685.32,1984.84 2695.33,1984.84 2734.33,2023.84 2734.33,2071.88 2737.12,2074.67 2798.1,2074.67 2798.56,2074.21 2853.54,2074.21 2942.75,1985 3046.72,1985 3111.72,2050 4235,2050 v1(4415,2230) ; DS1.13 4404.65,2849.65 U2.39
  Bottom Layer w10: DS1.13 4409.82,2474.74 4409.82,2235.18 v1(4415,2230)
NetDS1_14: DS1.14 P1.4 U2.40 | length 2701.9
  Top Layer w10: P1.4 2697.99,2015.79 2714.33,2032.13 2714.33,2080.17 2734.83,2100.67 2805.17,2100.67 2811.62,2094.21 4118.94,2094.21 DS1.14 4430,2554.57 4430,2775 U2.40
NetDS1_15: DS1.15 R11.2 | length 2132.5
  Top Layer w10: v1(2975,2025) 3058.43,2025 3103.43,2070 4194.72,2070 DS1.15
  Bottom Layer w10: v1(2810,2271.1) 2810,2190 v1(2975,2025)
NetDS1_16: DS1.16 Q2.2 SW10.1 | length 3492.1
  Top Layer w10: DS1.16 4704.65,2934.65 4770,3000 4770,3245 Q2.2
  Bottom Layer w10: SW10.1 2713.87,1698.58 2759.18,1743.9 3985.47,1743.9 4563.38,2321.82 4563.38,2338.66 DS1.16
NetP1_1: P1.1 R11.1 | length 160.4
  Top Layer w10: P1.1 2656.02,2158.9 R11.1
NetP2_3: P2.3 U2.25 | length 878.1
  Top Layer w10: P2.3 2649.53,2476.38 2724.76,2551.61 2724.76,2559.77 2745.27,2580.28 2753.43,2580.28 2787.33,2614.18 2965.63,2614.18 3094.65,2743.2 3094.65,2939.65 U2.25
NetP2_4: P2.4 U2.26 | length 902
  Top Layer w10: P2.4@2708.58,2415.3 P2.4 2708.58,2476.38 2744.76,2512.56 2744.76,2551.49 2753.55,2560.28 2821.09,2560.28 2855,2594.18 2973.91,2594.18 3130,2750.27 3130,2880 3235,2985 U2.26
NetQ1_2: Q1.2 R7.2 | length 1187.1
  Top Layer w10: v1(2915,2810) R7.2
  Bottom Layer w10: Q1.2@2761.52,1995 Q1.2@2770,1995 ; Q1.2 2761.52,1985 2743.19,2003.33 2743.12,2003.33 2734.33,2012.12 2734.33,2126.22 2755,2146.89 2755,2255 2683.19,2326.81 2654.67,2326.81 2616.48,2365 2570.86,2365 2565,2370.86 2565,2388.2 2550.47,2402.72 2550.47,2435.86 2565,2450.39 2565,2460 v1(2915,2810)
NetQ2_1: Q2.1 R1.1 | length 572.9
  Top Layer w10: R1.1 4775.83,3778.9 4936.1,3618.62 4936.1,3541.51 4993.54,3484.07 4993.54,3368.54 Q2.1
NetR1_2: R1.2 U2.10 | length 1384.7
  Top Layer w10: v1(4445,3845) 4445,3834.18 4466.77,3812.4 4466.77,3752.45 4475.56,3743.66 4708.46,3743.66 4717.52,3752.72 4717.52,3806.76 4737.52,3826.76 4737.52,3874.45 4754.17,3891.1 R1.2
  Bottom Layer w10: U2.10 3747.5,3592.5 3784.53,3592.5 3856.72,3664.69 4100.15,3664.69 4104.99,3669.53 4175.01,3669.53 4179.85,3664.69 4339.69,3664.69 4410,3735 4410,3810 v1(4445,3845)
NetR2_1: R2.1 R3.1 R5.1 SW11.3 | length 1808
  Top Layer w10: SW11.3 5926.73,2867.64 6095.11,2867.64 6103.9,2876.42 6103.9,3739.24 6022.48,3820.66 6022.48,3868.35 6005.83,3885 R5.1 5995,4073.9 R3.1 6005,4083.9 6005,4120.76 6047.48,4163.24 6047.48,4237.05 6020,4264.53 R2.1
NetR2_2: R2.2 SW3.4 | length 754.2
  Top Layer w10: SW3.4 5696.57,4467.2 5696.57,4627.79 5747.05,4678.27 5820.11,4678.27 5896.32,4602.06 5896.32,4543.41 5972.52,4467.2 R2.2
NetR3_2: R3.2 SW6.4 | length 474
  Top Layer w10: SW6.4 5800.47,4191.1 R3.2
NetR5_2: R5.2 SW9.4 | length 446
  Top Layer w10: SW9.4 5762.17,3772.8 R5.2
NetR6_1: R6.1 U2.24 | length 272.2
  Top Layer w10: R6.1 3020,2780.76 3067.48,2828.24 3067.48,2949.51 3040,2976.99 U2.24
NetR7_1: R7.1 U2.23 | length 297.1
  Top Layer w10: R7.1 2904.17,2743.9 2867.52,2780.55 2867.52,2912.52 U2.23
NetR8_1: R8.1 SW10.3 | length 4690.5
  Top Layer w10: SW10.3 2578.46,1465 2849.14,1465 2855,1470.86 2855,1925 2895,1965 3055,1965 3120,2030 4317.92,2030 4749.33,2461.41 4749.33,2580.67 4725,2605 4725,2889.14 4730.86,2895 5800,2895 5830,2925 5830,2925.62 5933.28,3028.9 R8.1
NetSW1_1: SW1.1 SW4.1 | length 415.5
  Bottom Layer w10: SW4.1 5153.58,4317.96 5113.27,4358.28 5113.27,4460.3 5158.58,4505.61 SW1.1
NetSW1_4: SW1.4 SW2.2 | length 529
  Top Layer w10: SW1.4 5026.73,4422.36 5423.27,4422.36 SW2.2 SW2.2@5471.65,4373.98
NetSW2_1: SW2.1 SW5.1 | length 417.5
  Bottom Layer w10: SW5.1 5513.9,4298.27 5513.9,4460.3 5468.58,4505.61 SW2.1
NetSW2_4: SW2.4 SW3.2 U2.2 | length 1976.4
  Top Layer w10: SW2.4 5336.73,4331.73 5625.19,4331.73 5670.5,4377.05 SW3.2
  Bottom Layer w10: U2.2 4584.53,3629.53 4719.53,3629.53 4740,3650 4740,3710 4910,3880 4910,4250.62 4957.65,4298.27 5026.42,4298.27 5117.05,4207.64 5190.11,4207.64 5235.92,4253.45 5235.92,4261.54 5291.42,4317.04 SW2.4
NetSW3_1: SW3.1 SW6.1 | length 417.5
  Top Layer w10: SW6.1 5783.58,4312.96 5828.9,4358.28 5828.9,4460.3 5783.58,4505.61 SW3.1
NetSW4_3: SW4.3 SW7.3 | length 414.6
  Bottom Layer w10: SW4.3 4976.42,4131.42 4931.1,4086.11 4931.1,3928.27 SW7.3
NetSW4_4: SW4.4 SW5.2 U2.3 | length 1729.1
  Top Layer w10: SW4.4 5111.34,4131.97 5114.45,4131.97 5198.9,4216.42 5198.9,4224.52 5272.65,4298.27 5310.19,4298.27 5423.27,4185.19 5423.27,4042.36 SW5.2
  Bottom Layer w10: U2.3 4484.53,3540.47 4675.74,3540.47 4725,3589.73 4725,3595 4962.64,3832.64 5000.19,3832.64 5026.73,3859.18 5026.73,3896.72 4976.42,3947.04 SW4.4
NetSW5_3: SW5.3 SW8.3 | length 414.6
  Top Layer w10: SW5.3 5291.42,4063.78 5246.1,4018.46 5246.1,3978.28 5296.42,3927.96 SW8.3
NetSW5_4: SW5.4 SW6.2 | length 529.7
  Top Layer w10: SW5.4 5336.73,3951.73 5625.19,3951.73 5670.5,3997.05 SW6.2
NetSW6_3: SW6.3 SW9.3 | length 414.6
  Bottom Layer w10: SW6.3 5606.42,4131.42 5561.1,4086.11 5561.1,3928.27 SW9.3
NetSW7_1: SW7.1 U2.7 | length 1335.4
  Bottom Layer w10: U2.7 4109.24,3617.19 cw(c4140,3585) 4171.57,3616.4 4190,3597.97 4190,3572.03 4221.56,3540.47 4456.24,3540.47 4476.24,3520.47 4684.02,3520.47 4704.02,3540.47 4708.02,3540.47 4980.19,3812.64 5024.07,3812.64 5089.38,3877.95 SW7.1
NetSW7_4: SW7.4 SW8.2 | length 529.7
  Top Layer w10: SW7.4 5026.73,3667.36 5428.27,3667.36 SW8.2
NetSW8_1: SW8.1 U2.6 | length 1559.3
  Bottom Layer w10: U2.6 4241.64,3483.36 4733.36,3483.36 4940,3690 5320,3690 5448.27,3818.27 5448.27,3852.64 SW8.1
NetSW8_4: SW8.4 SW9.2 U2.4 | length 2404.5
  Top Layer w10: SW8.4 5341.73,3576.73 5743.27,3576.73 SW9.2
  Bottom Layer w10: U2.4 4289.58,3585 4284.2,3590.38 ccw(c4240,3585) 4261.29,3624.11 4237.39,3637.19 4177.94,3637.19 ccw(c4140,3585) 4102.06,3637.19 4030.83,3637.19 4009.78,3617.7 ccw(c4040,3585) 4007.15,3615.06 3989.58,3595.94 3989.58,3522.03 3999.11,3512.5 4170.82,3512.5 4227.47,3455.86 4892.47,3455.86 4994.11,3557.5 5159.73,3557.5 5216.78,3614.55 5288.92,3614.55 SW8.4
pads on no net: DS1.6 DS1.S1 DS1.S2 DS1.S3 DS1.S4 K1.A1 K1.A2 P1.MP1 P1.MP2 P2.MP1 P2.MP2 SW1.2 SW1.3 SW2.3 SW3.3 SW4.2 SW7.2 SW9.1 SW10.2 U2.1 U2.5 U2.8 U2.9 U2.11 U2.12 U2.13 U2.15 U2.16 U2.17 U2.18 U2.19 U2.20 U2.22 U2.27 U2.28 U2.30 U2.31 U2.32

## Silkscreen, mask and mechanical layers (free items; w line width, h text height)
Top Overlay:
  the board outline again, w10
  text "OTP based Smart Lock" at 4945,4745 h60
  text "SKyware" at 4793.34,4015 h80 r90
  text "designed by Rahul" at 4760,2659.99 h60